# EAGLE board Monostable Multivibrator (EAGLE 9.0.1)
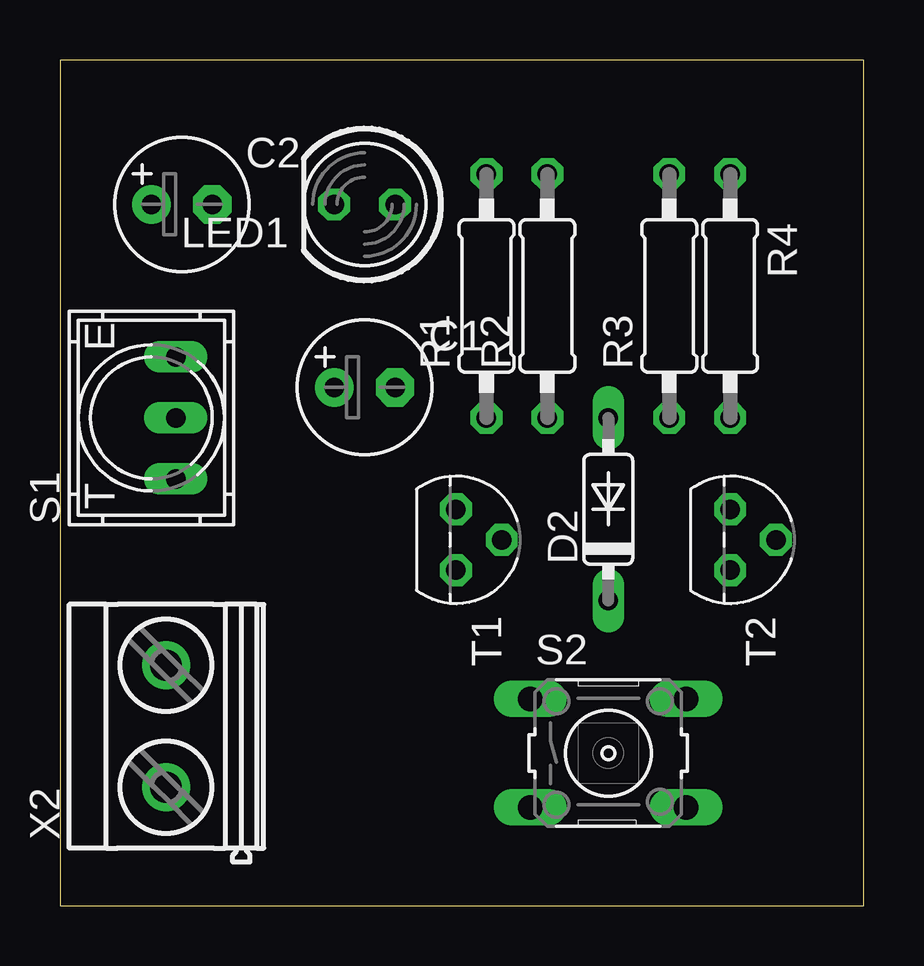
[diagram p0: board, top side]
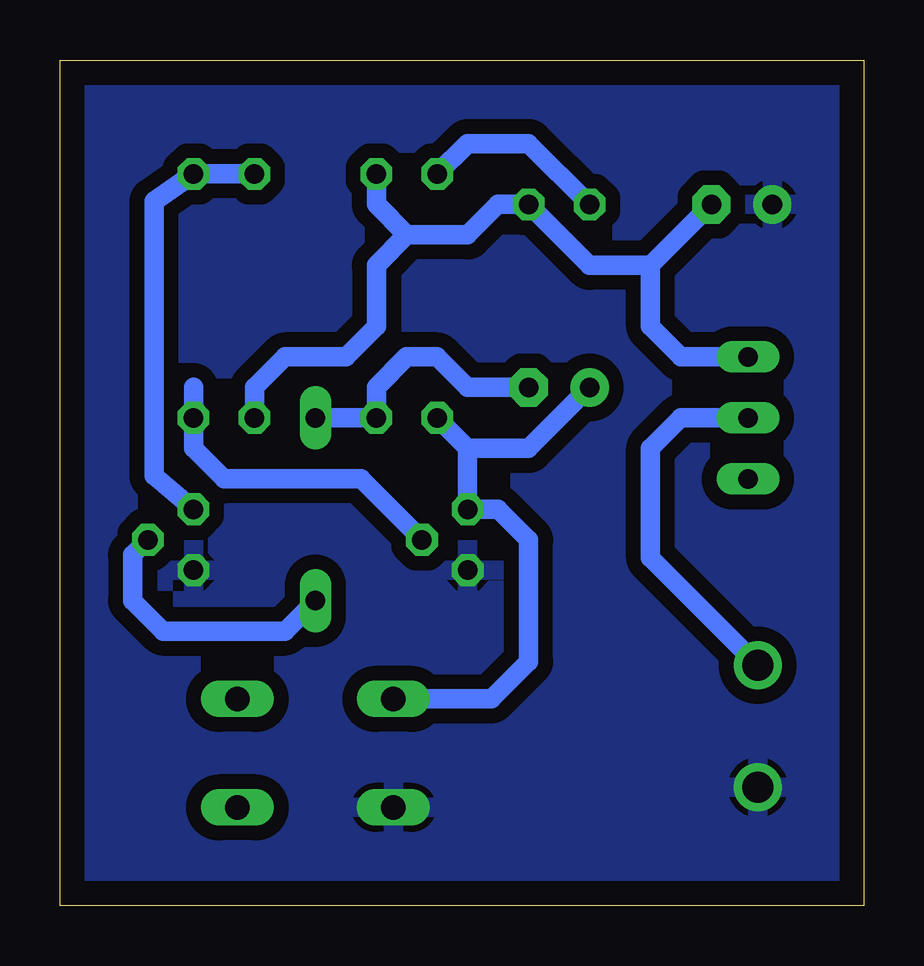
[diagram p1: board, bottom side, seen from below]

Size 33.51 x 35.23 mm. Coordinates in mm from the lower left corner, seen from the top.
Outline: 0,0 33.51,0 33.51,35.23 0,35.23 0,0
Copper layers (1*16): Top 0.035mm / dielectric 1.5mm / Bottom 0.035mm
Design rules "default": minimum track width 6mil, minimum drill 0.35mm, track to track 6mil, track to pad 6mil, pad to pad 6mil, via to via 6mil, smd to smd 6mil, copper to edge 40mil, drill to drill 6mil, minimum pad ring 10mil, minimum via ring 8mil, stop-mask expansion 4mil, vias tented up to drill 0mil, thermal gap 10mil

## Footprints (pad centres in the part's own frame; a part is rotated, then mirrored left to right if it is on the bottom)
E2,5-6 = drill 0.813 pad 1.6: + -1.27,0 | drill 0.813 pad 1.6 octagon: - 1.27,0
DO35-7 = drill 0.813 long: A 3.81,0; C -3.81,0
LED5MM = drill 0.813 octagon: A -1.27,0; K 1.27,0
0207/10 = drill 0.813 octagon: 1 -5.08,0; 2 5.08,0
9077-1 = drill 0.813 long: 1 -2.54,-1.016; 2 0,-1.016; 3 2.54,-1.016
B3F-10XX = drill 1.016 long: 1 -3.251,2.261; 2 3.251,2.261; 3 -3.251,-2.261; 4 3.251,-2.261
TO92 = drill 0.813 octagon: 1 1.27,0; 2 0,1.905; 3 -1.27,0
MKDSN1,5/2-5,08 = drill 1.3 pad 2: 1 -2.561,0.025; 2 2.519,0.025

## Placement (x,y rotation side)
C1  100u  [E2,5-6]  12.7,21.59 0 top
C2  100u  [E2,5-6]  5.08,29.21 0 top
D2  1N4148DO35-7  [DO35-7]  22.86,16.51 90 top
LED1  [LED5MM]  12.7,29.21 180 top
R1  470  [0207/10]  17.78,25.4 90 top
R2  100k  [0207/10]  20.32,25.4 90 top
R3  2,2k  [0207/10]  25.4,25.4 90 top
R4  100k  [0207/10]  27.94,25.4 270 top
S1  9077-1  [9077-1]  3.81,20.32 90 top
S2  [B3F-10XX]  22.86,6.35 0 top
T1  BC547  [TO92]  16.51,15.24 270 top
T2  BC547  [TO92]  27.94,15.24 270 top
X2  MKDSN1,5/2-5,08  [MKDSN1,5/2-5,08]  4.45,7.49 90 top

## Library data of the parts
C1 C2 = rcl; SPICEPREFIX: C
D2 = diode
LED1 = led
R1-R4 = rcl; SPICEPREFIX: R
S1 = switch-misc
S2 = switch-omron; MPN: B3F-1000; OC_FARNELL: 176432; OC_NEWARK: 36M3542
T1 T2 = transistor-npn
X2 = con-phoenix-508

## Nets
GND: C2.+ S2.3 T1.1 T2.1 X2.1
N$1: LED1.K R1.2
N$2: C1.+ R1.1 S2.1 T1.3
N$3: S1.2 X2.2
N$5: R4.2 T1.2
N$6: C1.- D2.A R2.1
N$8: D2.C T2.2
N$11: R3.2 R4.1 T2.3
VCC: C2.- LED1.A R2.2 R3.1 S1.3

## Tracks (layer width: path | path; a pad name or v marks a point on that pad's centre or on a via)
GND
  pour Bottom (isolate 0.61): -1.27,36.83 -1.27,-1.27 34.29,-1.27 34.29,36.83
N$1
  Bottom 0.813: R1.2 16.51,31.75 13.97,31.75 LED1.K
N$2
  Bottom 0.813: C1.+ 13.97,19.05 16.51,19.05 | R1.1 16.51,19.05 | 16.51,19.05 T1.3 15.24,16.51 13.97,15.24 13.97,10.16 15.52,8.61 S2.1
N$3
  Bottom 0.813: X2.2 8.89,14.48 8.89,19.05 7.62,20.32 S1.2
N$5
  Bottom 0.813: 27.94,21.59 R4.2 27.94,19.05 26.67,17.78 20.95,17.78 T1.2
N$6
  Bottom 0.813: D2.A R2.1 20.32,21.59 19.05,22.86 17.78,22.86 16.51,21.59 C1.-
N$8
  Bottom 0.813: T2.2 30.48,14.61 30.48,12.7 29.21,11.43 24.13,11.43 D2.C
N$11
  Bottom 0.813: R3.2 R4.1 29.59,29.34 29.59,17.91 T2.3
VCC
  Bottom 0.813: S1.3 7.62,22.86 8.89,24.13 8.89,26.67 | 8.89,26.67 C2.- | 8.89,26.67 11.43,26.67 LED1.A 15.24,29.21 16.51,27.94 19.05,27.94 | 19.05,27.94 20.32,29.21 R2.2 | 19.05,27.94 20.32,26.67 20.32,24.13 21.59,22.86 24.13,22.86 25.4,21.59 R3.1